# Altium PCB Top.PcbDoc
Units mil, origin at the board's own origin, x right, y up, seen from the top; angles counter-clockwise.
Board outline 575 x 445 mil, 2 copper layers (Top Layer, Bottom Layer); 5 components, 7 nets, 14 pads, 0 vias.
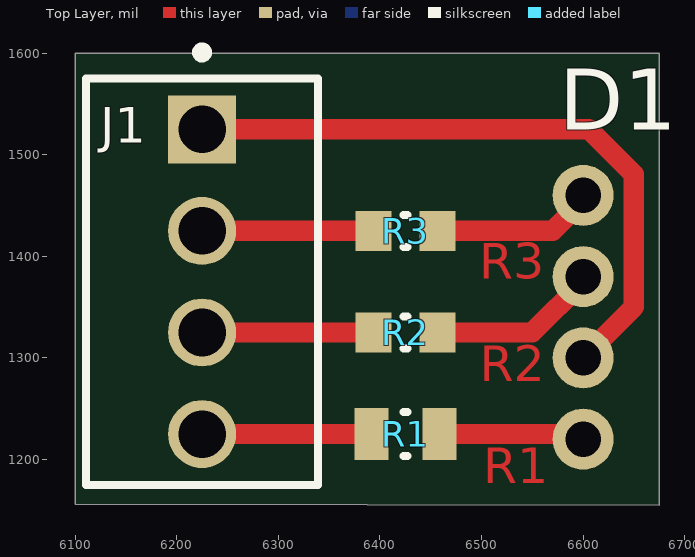
[diagram p0: Top Layer view]
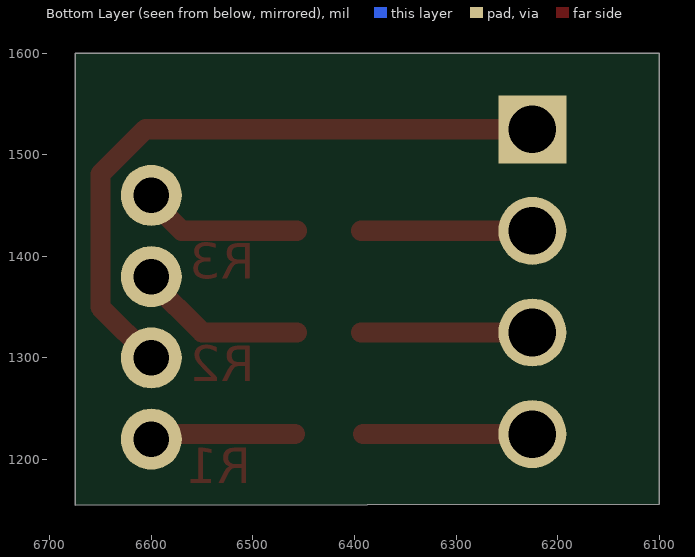
[diagram p1: Bottom Layer view, seen from below]

## Layer stack, top to bottom
Top Solder: solder mask 0.4, Solder Resist, Dk 3.5
Top Layer: signal copper 1.4
Dielectric 1: dielectric 12.6, FR-4, Dk 4.8
Bottom Layer: signal copper 1.4
Bottom Solder: solder mask 0.4, Solder Resist, Dk 3.5

## Board outline
6100,1155.86 6100,1600 6675,1600 6675,1155

## Design rules (kind name [scope] priority, off if disabled: settings)
Clearance [All] p1: gap=10 ignorepadtopadclearanceinfootprint=FALSE except(0: Arc-Hole Track-Hole SMDPad-Hole THPad-Hole Via-Hole Fill-Hole Poly-Hole Region-Hole Text-Hole)
PolygonConnect [All] p1: connectstyle=Relief reliefconductorwidth=10 reliefentries=4 polygonreliefangle="90 Angle" airgapwidth=10
RoutingVias [All] p1: holewidth=28 width=50 viastyle="Through Hole" minholewidth=28 minwidth=50 maxholewidth=28 maxwidth=50
SolderMaskExpansion [All] p1: expansion=4
Width [All] p1: maxlimit=200 minlimit=10 preferedwidth=10
30 further rules are at their usual default settings.

## Components (designator, comment, footprint, x,y, rotation, side; value= is the part's Value field where it differs from the comment)
D1 "RGB_LED_CATHODE" RGB_LED_Cathode 6600,1340 r90 top
J1 "22-27-2041" MOLX-22-27-2041_V 6225,1375 r90 top
R1 "243K 1% 0805(2012)" RESC0805(2012)_L 6425,1225 r0 top value=270
R2 "9M1 1% 0603(1608)" RESC0603(1608)_N 6425,1325 r0 top value=60
R3 "9M1 1% 0603(1608)" RESC0603(1608)_N 6425,1425 r0 top value=60

## Footprints (in the part's own frame and the unit in brackets; to place one, negate y for a bottom-side part, rotate by r counter-clockwise, add the part's x,y. Pads: shape width x height; smd on the part's side, far side on the other; paste and mask are expansions set on the pad)
MOLX-22-27-2041_V [mm] "CONN, 4-Leads, Body 10.16x5.8mm, Pitch 2.54mm"
  rect 1.7x1.7 hole 1.19: 1(3.81,0)
  round 1.7 hole 1.19: 2(1.27,0) 3(-1.27,0) 4(-3.81,0)
  silkscreen extent -5.08,-2.9 5.85,2.9, body extent -5.08,-2.9 5.08,2.9, height 11.7
RESC0603(1608)_N [mm] "Chip Resistor, Body 1.6x0.8mm, IPC Medium Density"
  rect 0.9x1 smd: 1(-0.8,0) 2(0.8,0)
  silkscreen extent -0.05,-0.4 0.05,0.4, body extent -0.85,-0.47 0.85,0.47, height 0.6
RESC0805(2012)_L [mm] "Chip Resistor, Body 2.0x1.3mm, IPC High Density"
  rect 0.85x1.3 smd: 1(-0.85,0) 2(0.85,0)
  silkscreen extent -0.05,-0.55 0.05,0.55, body extent -1.1,-0.67 1.1,0.68, height 0.7
RGB_LED_Cathode [mil]
  round 60 hole 35: B(120,0) Common(-40,0) G(40,0) R(-120,0)

## Part data
J1: library part CMP-2000-05243-1, "Male Header, Pitch 2.54 mm, 1 x 4 Position, Height 11.7 mm, Tail Length 3.56 mm, RoHS, Bulk", Current rating=4A, Manufacturer=Molex, Operating temperature=0degCto+75degC, Voltage rating=250V, Contact material=Tinplatedbrass, Datasheet URL=http://www.molex.com/pdm_docs/sd/022272041_sd.pdf, Datasheet Version="Rev. F, 06/2009", Housing material=Nylon(UL94V-0), Manufacturer URL=http://www.molex.com/
R1: library part CMP-1013-00778-1, "243K 0.125W 1% 0805 (2012 Metric)  SMD", Case-EIA=0805, Case-Metric=2012, Power="0.125 W", Tolerance="1 %", Technology=SMT
R2 R3: library part CMP-1012-00958-1, "9M1 0.1W 1% 0603 (1608 Metric)  SMD", Case-EIA=0603, Case-Metric=1608, Power="0.1 W", Tolerance="1 %", Technology=SMT

## Nets (pads, with @x,y where several pads share a name; then routed paths per layer and width w, separated by ;. In a path a pad name is that pad's centre, name@x,y a point inside that pad or via, vN(x,y) a via of type N, cw(c..) or ccw(c..) an arc to the next point about the centre after c; other vN are vias at no path point)
BLUE: J1.2 R3.1 | length 168.5
  Top Layer w20: J1.2 R3.1
GND: D1.Common J1.1 | length 644.8
  Top Layer w20: J1.1 6605.71,1525 6650,1480.71 6650,1350 D1.Common
GREEN: J1.3 R2.1 | length 168.5
  Top Layer w20: J1.3 R2.1
NetD1_B: D1.B R3.2 | length 155.9
  Top Layer w20: R3.2 6570,1425 D1.B@6600,1455
NetD1_G: D1.G R2.2 | length 164.2
  Top Layer w20: R2.2 6550,1325 D1.G@6600,1375
NetD1_R: D1.R R1.2 | length 145.7
  Top Layer w15: D1.R@6590,1225 D1.R@6600,1215
  Top Layer w20: R1.2 D1.R@6590,1225
RED: J1.4 R1.1 | length 166.5
  Top Layer w20: J1.4 R1.1

## Silkscreen, mask and mechanical layers (free items; w line width, h text height)
Board Outline:
  lines w10: 6100,1155.86 6100,1575 6100,1600 6650,1600 6675,1600 6675,1488.96 6675,1266.89 6675,1155.86 ; 6100.86,1155 6650,1155 6675,1155